# Altium PCB dimmerV2.PcbDoc
Units mil, origin at the board's own origin, x right, y up, seen from the top; angles counter-clockwise.
Board outline 2755.91 x 1732.28 mil, 2 copper layers (Top Layer, Bottom Layer); 25 components, 21 nets, 79 pads, 74 vias.
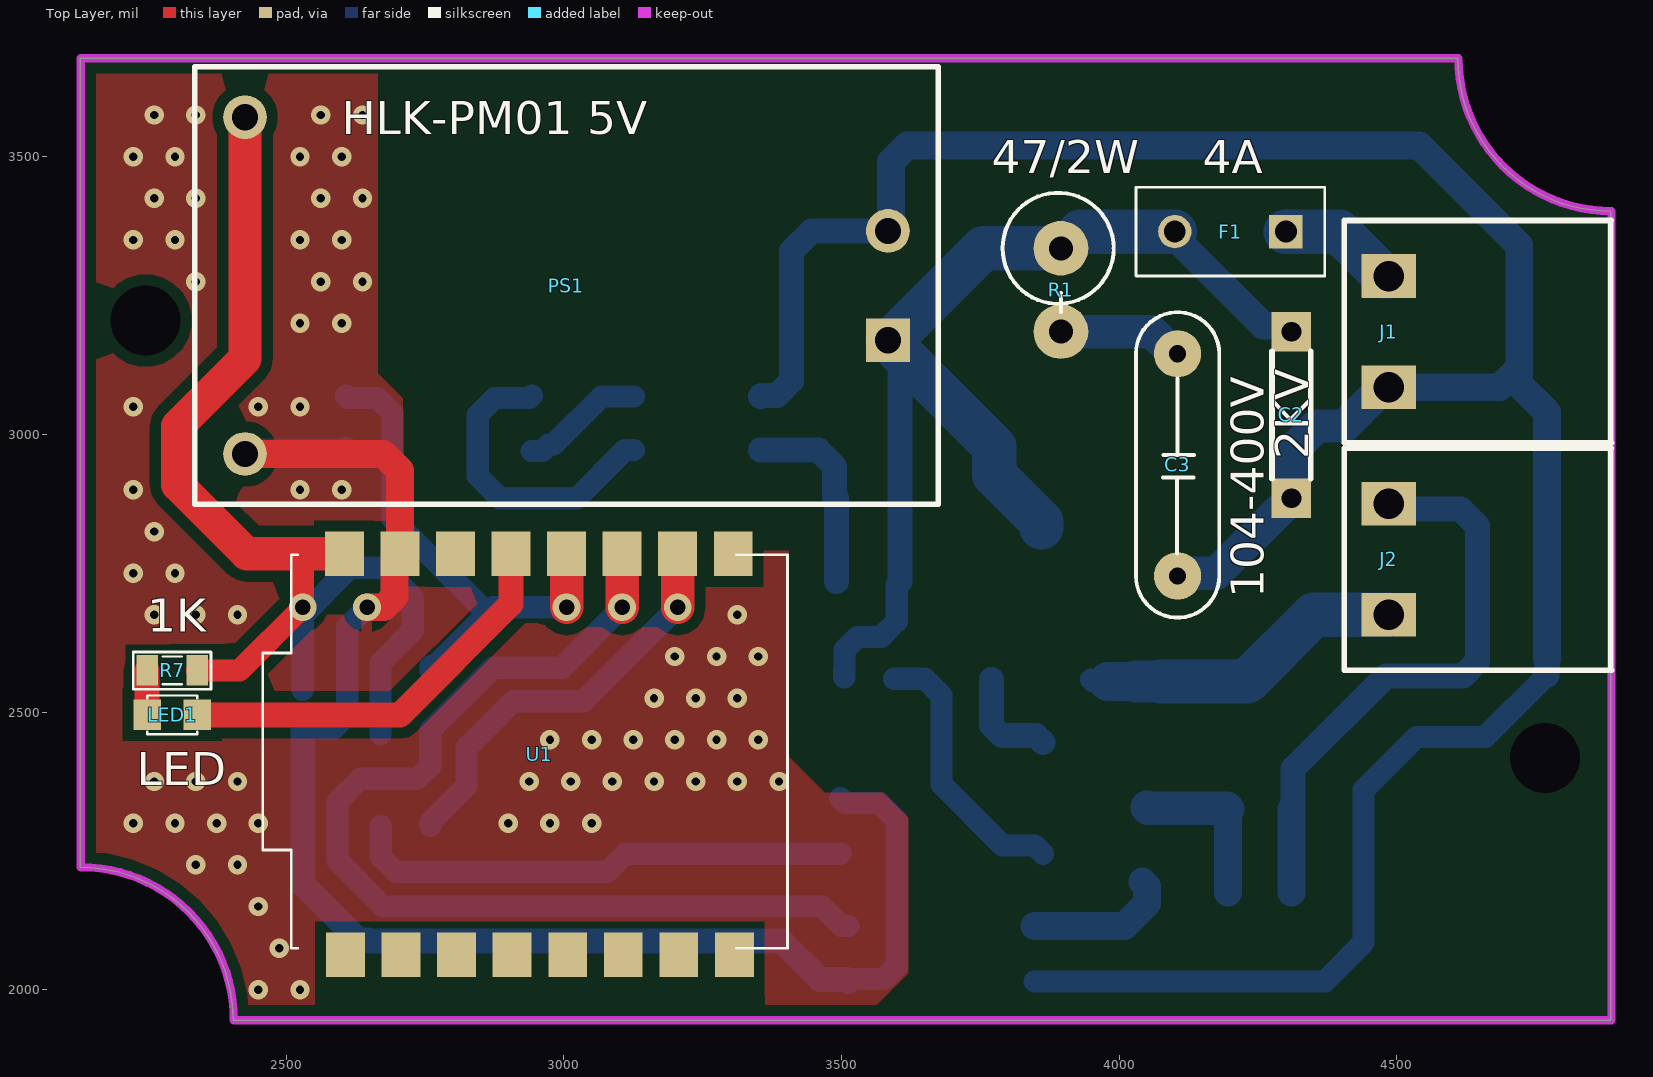
[diagram p0: Top Layer view]
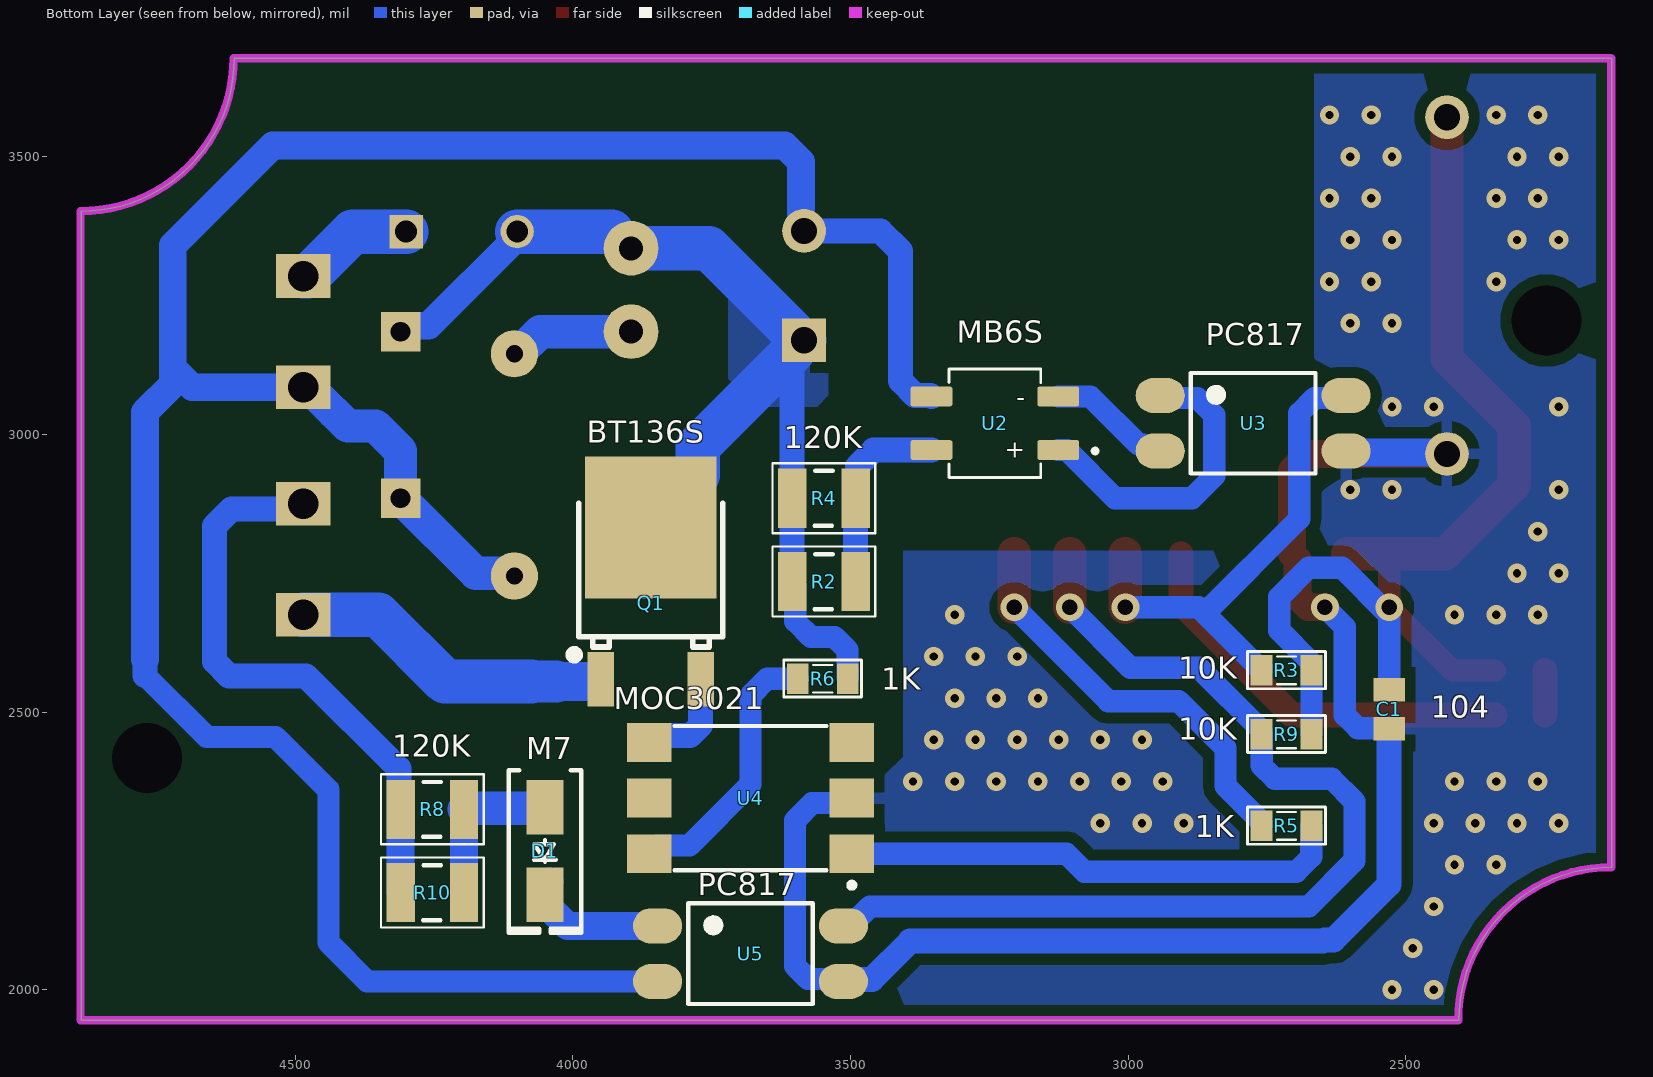
[diagram p1: Bottom Layer view, seen from below]

## Layer stack, top to bottom
Top Solder: solder mask 0.4, Solder Resist, Dk 3.5
Top Layer: signal copper 1.4
Dielectric 1: dielectric 12.6, FR-4, Dk 4.8
Bottom Layer: signal copper 1.4
Bottom Solder: solder mask 0.4, Solder Resist, Dk 3.5

## Board outline
2129.09,2220.59 cw(c2129.09,1945) 2404.69,1945 4885,1945 4885,3401.69 cw(c4885,3677.28) 4609.41,3677.28 2129.09,3677.28

## Design rules (kind name [scope] priority, off if disabled: settings)
Clearance Clearance_1 [InNetClass('AC') vs InNetClass('AC')] p1: gap=35 ignorepadtopadclearanceinfootprint=FALSE
Clearance [All] p2: gap=20 ignorepadtopadclearanceinfootprint=FALSE
PlaneConnect PlaneConnect_1 [InNetClass('AC')] p1: planeconnectstyle=Direct reliefexpansion=20 reliefentries=4 reliefconductorwidth=10 reliefairgap=10
PlaneConnect [All] p2: planeconnectstyle=Relief reliefexpansion=20 reliefentries=4 reliefconductorwidth=10 reliefairgap=10
PolygonConnect [All] p1: connectstyle=Relief reliefconductorwidth=19.68 reliefentries=4 polygonreliefangle="90 Angle" airgapwidth=19.68
RoutingVias [All] p1: holewidth=28 width=50 viastyle="Through Hole" minholewidth=28 minwidth=50 maxholewidth=28 maxwidth=50
SolderMaskExpansion [All] p1: expansion=4 istentingtop=FALSE
SupplyNets "Schematic Supply Nets_1" [InNet('GND')] p1: voltage=0.000
SupplyNets "Schematic Supply Nets" [InNet('+5')] p2: voltage=0.000
Width [All] p1: maxlimit=80 minlimit=30 preferedwidth=40
29 further rules are at their usual default settings.

## Classes and differential pairs
net class AC: AC_L AC_LOUT AC_N NetD1_1 NetD1_2 NetF1_1

## Components (designator, comment, footprint, x,y, rotation, side; value= is the part's Value field where it differs from the comment)
C1 "104" "cap 0805" 2530,2505 r270 bottom
C2 "2KV" "Cap 7.5mm" 4310,2885 r90 top
C3 "104-400V" "Cap 10mm" 4105,3145 r270 top
D1 "M7" "DIODE SMA" 4050,2250 r270 bottom
F1 "4A" "Fuse rectangular" 4300,3365 r180 top value=Fuse
J1 "AC IN" "CON 2 2EDG5.08 B" 4485,3285 r270 top
J2 "CON 2" "CON 2 2EDG5.08 B" 4485,2875 r270 top
LED1 "LED" LED-0805-Blue 2250,2495 r0 top value="LED 3 - 5 ly 2 Colour"
PS1 "HLK-PM01 5V" CONV_HLK-PM01-3W 3583.5,3267.87 r180 top
Q1 "BT136S" TO-252-3_L6.6-W6.1-P4.57-LS9.9-BR-CW 3865,2735 r270 bottom
R1 "47/2W" R2WD 3895,3135 r90 top value="R2W - 47"
R2 "120K" RES-SMD-1210 3550,2735 r180 bottom
R3 "10K" RES-SMD-0805 2715,2575 r0 bottom
R4 "120K" RES-SMD-1210 3550,2885 r180 bottom
R5 "1K" RES-SMD-0805 2715,2295 r0 bottom
R6 "1K" RES-SMD-0805 3550,2560 r0 bottom
R7 "1K" RES-SMD-0805 2295,2575 r0 top
R8 "120K" RES-SMD-1210 4255,2325 r180 bottom
R9 "10K" RES-SMD-0805 2715,2460 r0 bottom
R10 "120K" RES-SMD-1210 4255,2175 r180 bottom
U1 "ESP32-C3" ESP32-C3-SMD 2766,-226 r90 top
U2 "MB6S" TO269AA 3240,3020 r0 bottom
U3 "PC817" SOP4 2775,3020 r180 bottom
U4 "MOC3021" SO6 3680,2345 r90 bottom
U5 "PC817" SOP4 3680,2065 r180 bottom

## Footprints (in the part's own frame and the unit in brackets; to place one, negate y for a bottom-side part, rotate by r counter-clockwise, add the part's x,y. Pads: shape width x height; smd on the part's side, far side on the other; paste and mask are expansions set on the pad)
"Cap 7.5mm" [mm] "103 2KV"
  rect 1.8x1.8 hole 0.9: 1(0,0) 2(7.62,0)
  silkscreen extent 0.89,-0.89 6.73,0.89, body extent -0.19,-1.2 7.81,1.19, height 9.03
"Cap 10mm" [mil] "Cap np W 0.4"
  round 85 hole 31: 1(0,0) 2(400,0)
  silkscreen extent -75,-75 475,75, body extent -25,-64 431,64, height 236
"cap 0805" [mm]
  rect 1.08x1.42 smd: 1(-0.895,0) 2(0.895,0)
  body extent -1,-0.63 1,0.63, height 1.4
"CON 2 2EDG5.08 B" [mm]
  rect 2x2.5 hole 1.4: 1(0,0) 2(5.08,0)
  silkscreen extent -2.54,-2.03 7.62,10.21, body extent -2.5,-1.75 7.58,10.25, height 3.15
CONV_HLK-PM01-3W [mm]
  rect 2x2 hole 1.2: 1(0,2.5)
  round 2 hole 1.2: 2(0,-2.5) 3(29.4,7.7) 4(29.4,-7.7)
  silkscreen extent -2.3,-10 31.7,10, body extent -2.29,-10.1 31.71,10.1, height 15.3
"DIODE SMA" [mm] "SMA"
  rect 2.5x1.7 smd: 1(-2,0) 2(2,0)
  silkscreen extent -3.68,-1.65 3.75,1.65, body extent -2.6,-1.37 2.6,1.37, height 2.4
ESP32-C3-SMD [mil]
  rect 80x70 smd: 0(3011,-539) 1(3011,-439) 2(3011,-339) 3(3011,-239) 3.3(3011,-39) 4(3011,-139) 5(2289,159) 5V(3011,161) 6(2289,59) 7(2289,-41) 8(2289,-141) 9(2289,-241) 10(2289,-341) 20(2289,-441) 21(2289,-541) G(3011,61)
  silkscreen extent 2301,-637 3009,308, body extent 2296,-675 3004,270, height 164
"Fuse rectangular" [mil] "5.08 0.6"
  rect 60x60 hole 39.37: 1(0,0)
  round 60 hole 39.37: 2(200,0)
  silkscreen extent -70,-80 270,80, body extent -67,-79 267,79, height 315
LED-0805-Blue [mil]
  rect 50x55 smd: 1(0,0) 2(90,0)
  silkscreen extent 0,-35 90,35, body extent 5,-25 85,25, height 43
R2WD [mm] "R2W, 2 pin, 150mil"
  round 2.5 hole 1.1: 1(1.27,0) 2(5.08,0)
  silkscreen extent 2.16,-2.41 7.62,2.67, body extent -1.25,-2.41 7.6,2.59, height 13.97
RES-SMD-0805 [mil]
  rect 39.37x55 smd: 1(-45,0) 2(45,0)
  silkscreen extent -70,-34 70,33, body extent -39,-25 39,25, height 31
RES-SMD-1210 [mm] "Chip Capacitor, Body 3.2x2.5mm, IPC Medium Density"
  rect 1.3x2.7 smd: 1(-1.397,0) 2(1.503,0)
  silkscreen extent -2.3,-1.6 2.4,1.6, body extent -1.6,-1.25 1.6,1.25, height 0.6
SO6 [mil]
  rect 70x80 smd: 1(-100,-182.48) 2(0,-182.48) 3(100,-182.48) 5(0,182.48) 6(-100,182.48)
  rect 70x80 smd mask+0: 4(100,182.48)
  silkscreen extent -162,-187 130,137, body extent -138,-212 138,211, height 141
SOP4 [mm]
  oval 2.25x1.6 smd: 1(-4.25,1.27) 2(-4.25,-1.27) 3(4.25,-1.27) 4(4.25,1.27)
  silkscreen extent -2.85,-2.3 2.85,2.3, body extent -4.67,-2.29 4.93,2.31, height 3.6
TO269AA [mm]
  rrect23% 1.91x0.91 smd: 1(-2.9,1.225) 2(-2.9,-1.225) 3(2.9,-1.225) 4(2.9,1.225)
  silkscreen extent -4.68,-2.48 2.1,2.48, body extent -3.57,-2.44 3.47,2.51, height 2.7
TO-252-3_L6.6-W6.1-P4.57-LS9.9-BR-CW [mm]
  rect 2.5x1.2 smd: 1(4.475,-2.149) 3(4.475,2.423)
  rect 6.5x6 smd: 2(-2.475,0.137)
  silkscreen extent -3.57,-3.56 3.55,3.44, body extent -4.23,-3.29 5.47,3.29, height 2.32

## Part data
C1 C3: library part CN, "Capacitor"
C2: library part "Cap 103 2KV", "Capacitor Ceramic 2KV"
D1: library part "Diode M7 ( 4007 )", "Dán", Chung_Loai=Dán, Don_Vi=Con, Ma_Hang=MH000944, Ten_Linh_Kien="Diode M7 1N4007 SMD 1A 1000V"
F1: library part Fuse, "Fuse", Designed by=VanDungEvn
J1 J2: library part "CON 2 EDG", "CON2 KF terminal"
LED1: library part "LED SMD"
PS1: library part "CONV HLK-PM01", "220VAC to 5V"
Q1: library part BT136-800E_C2901010
R1: library part R2W, "Resistor 2W"
R2 R3 R4 R5 R6 R7 R8 R9 R10: library part Res-SMD, "Resistor", Manufacturer="Generic Components", Class=Passive, Published=08/06/2000, Publisher="Altium Hobart Technology Centre"
U2: "Bridge Rectifier"
U3 U5: library part "OPTO PC817 SMD", "Single Opto"
U4: "Single Opto"

## Free pads (board coordinates)
  round 60 hole 125.98: ""(2247.2,3204.84) ""(4766.89,2417.44)

## Via types
v1: diameter 35, hole 15, Top Layer to Bottom Layer, tented both sides, 69 vias
v2: diameter 50, hole 28, Top Layer to Bottom Layer, tented both sides, 5 vias

## Nets (pads, with @x,y where several pads share a name; then routed paths per layer and width w, separated by ;. In a path a pad name is that pad's centre, name@x,y a point inside that pad or via, vN(x,y) a via of type N, cw(c..) or ccw(c..) an arc to the next point about the centre after c; other vN are vias at no path point)
+5: C1.1 PS1.4 R3.1 R7.2 R9.1 U1.5V | length 2049.9
  Top Layer w40: R7.2 2416.34,2575 v2(2530,2688.66) 2530,2785
  Top Layer w60: PS1.4 2426.02,3136.02 2305,3015 2305,2909.36 2429.36,2785 2530,2785 U1.5V
  Bottom Layer w40: C1.1 2530,2675 2530.21,2675 2615.21,2760 2675,2760 2727.87,2707.13 2727.87,2646.63 2670.31,2589.07 R3.1@2670.31,2582.5 ; R9.1 R3.1
AC_L: C2.2 F1.2 PS1.1 Q1.2 R1.2 R2.1 R4.1 R6.1 | length 1943.5
  Bottom Layer w40: R6.1@3505,2562.5 3505,2574.35 3505.31,2574.66 3505.31,2611.57 3528.74,2635 3570.98,2635 3599.41,2663.43 3599.41,2729.41 R2.1
  Bottom Layer w45: PS1.1 3605,3147.95 R4.1 R2.1
  Bottom Layer w50: F1.2 4101.91,3363.09 4101.91,3353.09 4259.57,3195.43 4299.57,3195.43 C2.2
  Bottom Layer w80: PS1.1 3589.45,3169.45 3755,3335 R1.2 ; PS1.1@3605,3147.95 3775,2977.95 3775,2926.91 3859.63,2842.28 Q1.2 ; R1.2@3929.99,3365 F1.2
AC_LOUT: J2.2 Q1.1 | length 586.8
  Bottom Layer w40: Q1.1 3949.63,2558.62 3953.25,2555 3980,2555
  Bottom Layer w70: 3980,2555 4030,2555
  Bottom Layer w75: 4030,2555 4075,2555
  Bottom Layer w80: 4075,2555 4230,2555 4350,2675 J2.2
AC_N: C2.1 C3.2 J1.2 PS1.2 U2.3 U5.2 | length 4715.7
  Bottom Layer w40: U5.2 4370,2015 4440,2085 4440,2360 4535,2455 4658.8,2455 4770,2566.2
  Bottom Layer w45: U2.3 3355.94,3070 3383.64,3070 3410,3096.36 3410,3330 3446.3,3366.3 PS1.2 ; 4770,2566.2 4770,2595
  Bottom Layer w50: PS1.2 3589,3371.8 3589,3490.71 3618.29,3520 4540,3520 4720,3340 4720,3120 ; J1.2@4530,3085 4685,3085 4720,3120 ; 4770,2595 4770,3040 4720,3090 4720,3120
  Bottom Layer w60: C3.2 4109.78,2749.78 4174.78,2749.78 C2.1 4310,2970 4355,3015 4405,3015 4430,3040 4430.16,3040 4475.16,3085 J1.2
DIM: R5.2 U1.1 | length 748.3
  Top Layer w60: v2(3205,2688.66) U1.1
  Bottom Layer w40: R5.2 2760,2302.19 2825,2367.19 2825,2435 2909.62,2519.62 3035.97,2519.62 v2(3205,2688.66)
GND: C1.2 PS1.3 U1.G U3.3 U4.2 U5.3 | length 2877.8
  Top Layer w50: PS1.3 2675.28,2964.72 2705,2935 U1.G 2695,2775 2695,2707.94 2675.71,2688.66 v2(2645.71,2688.66)
  Bottom Layer w40: C1.2 2531.26,2471.02 2586.57,2471.02 2610,2494.46 2610,2652.94 v2(2645.71,2688.66) ; U4.2 3506.21,2336.31 3568.69,2336.31 3600,2305 3600,2042.83 3576.57,2019.4 3517.08,2019.4 U5.3
  Bottom Layer w45: C1.2 2530,2190 2630,2090 2646.61,2090 2649.11,2087.5 3392.5,2087.5 3461.56,2018.44 3509.23,2018.44 U5.3
  Bottom Layer w50: PS1.3 2428.81,2967.51 2605.19,2967.51 U3.3
  other v1: 2450,2000 2525,2000 2487.5,2075 2450,2150 2337.5,2225 2412.5,2225 2225,2300 2300,2300 2375,2300 2450,2300 2900,2300 2975,2300 3050,2300 2262.5,2375 2337.5,2375 2412.5,2375 2937.5,2375 3012.5,2375 3087.5,2375 3162.5,2375 3237.5,2375 3312.5,2375 3387.5,2375 2975,2450 3050,2450 3125,2450 3200,2450 3275,2450 3350,2450 3162.5,2525 3237.5,2525 3312.5,2525 3200,2600 3275,2600 3350,2600 2262.5,2675 2337.5,2675 2412.5,2675 3312.5,2675 2225,2750 2300,2750 2262.5,2825 2225,2900 2525,2900 2600,2900 2225,3050 2450,3050 2525,3050 2525,3200 2600,3200 2337.5,3275 2562.5,3275 2637.5,3275 2225,3350 2300,3350 2525,3350 2600,3350 2262.5,3425 2337.5,3425 2562.5,3425 2637.5,3425 2225,3500 2300,3500 2525,3500 2600,3500 2262.5,3575 2337.5,3575 2562.5,3575 2637.5,3575
NetC3_1: C3.1 R1.1 | length 226.6
  Bottom Layer w60: R1.1 4058.24,3185 4098.24,3145 C3.1
NetD1_1: D1.1 R8.2 R10.2 | length 297.4
  Bottom Layer w50: R10.2 R8.2
  Bottom Layer w60: D1.1 4051.87,2326.87 4193.96,2326.87 R8.2
NetD1_2: D1.2 U5.1 | length 262.5
  Bottom Layer w50: U5.1 4009.49,2115 4050,2155.51 D1.2 4050,2186.54 D1.2@4041.54,2195
NetF1_1: F1.1 J1.1 | length 218.1
  Bottom Layer w80: F1.1 4396.42,3365 4476.42,3285 J1.1
NetLED1_1: LED1.1 R7.1 | length 80
  Top Layer w45: LED1.1 R7.1
NetLED1_2: LED1.2 U1.4 | length 737.8
  Top Layer w45: LED1.2 2705,2495 2905,2695 U1.4
NetQ1_3: Q1.3 U4.4 | length 188.3
  Bottom Layer w45: Q1.3 3769.63,2476.36 3788.49,2457.5 3849.98,2457.5 U4.4
NetR2_2: R2.2 R4.2 U2.4 | length 354.3
  Bottom Layer w45: U2.4 3458.23,2971.77 3487.74,2942.26 3487.74,2888.09 R4.2 R2.2
NetR5_1: R5.1 U4.1 | length 907.5
  Bottom Layer w40: R5.1 2670.31,2294.69 2670.31,2239.54 2697.43,2212.43 3078.69,2212.43 3111.26,2245 U4.1
NetR6_2: R6.2 U4.6 | length 491.7
  Bottom Layer w40: R6.2 3650,2560 3680,2530 3680,2370 3790,2260 3847.48,2260 U4.6
NetU2_1: U2.1 U3.1 | length 555.2
  Bottom Layer w40: U3.1 2937.92,3065.6 2875.6,3065.6 2845,3035 2845,2925 2885,2885 3023.54,2885 3110.31,2971.77 U2.1
NetU2_2: U2.2 U3.2 | length 224.2
  Bottom Layer w40: U3.2 2961.34,2970 2972.84,2981.5 2981.5,2981.5 3068.23,3068.23 U2.2
SW: J2.1 R8.1 R10.1 | length 1056.5
  Bottom Layer w45: R8.1 4313.09,2328.09 4313.09,2398.09 4480,2565 4618.64,2565 4645,2591.36 4645,2835 4614.52,2865.48 4494.52,2865.48 J2.1
  Bottom Layer w50: R10.1 R8.1
SW_IN: R9.2 U1.2 U5.4 | length 1859
  Top Layer w60: v2(3105,2688.66) U1.2
  Bottom Layer w40: R9.2 2759.68,2459.69 2759.68,2403.43 2736.25,2380 2633.43,2380 2592.5,2339.07 2592.5,2232.5 2675,2150 3464.95,2150 3499.95,2115 U5.4 ; R9.2@2760,2467.19 2872.43,2579.62 2995.97,2579.62 v2(3105,2688.66)
ZC: R3.2 U1.3 U3.4 | length 921.3
  Top Layer w60: v2(3005,2688.66) U1.3
  Bottom Layer w40: U3.4 2612.08,3065.6 2664.4,3065.6 2691.97,3038.03 2691.97,2848.03 2862.5,2677.5 ; R3.2 2760,2582.19 2760.31,2582.5 2767.5,2582.5 2873.65,2688.66 v2(3005,2688.66)
pads on no net: U1.0 U1.3.3 U1.5 U1.6 U1.7 U1.8 U1.9 U1.10 U1.20 U1.21 U4.3 U4.5

## Polygon pours and split planes (outlines as drawn)
AC_L on Bottom Layer "AC_L_L02_P002" (solid, pour order 2): 3720,3320 3720,3100 3670,3050 3560,3050 3540,3070 3540,3210 3605,3210 3700,3305
GND on Bottom Layer "GND_L02_P001" (solid, pour order 1): 2125,2220 2195,2220 2215,2200 2250,2200 2290,2160 2295,2160 2385,2070 2385,2015 2405,1995 2405,1945 3535,1945 3620,2030 3620,2310 3575,2355 3470,2355 3405,2420 3405,2790 2800,2790 2710,2880 2710,3065 2665,3110 2665,3675 2125,3675
GND on Top Layer "GND_L01_P111" (solid, pour order 0): 2125,2220 2195,2220 2215,2200 2250,2200 2290,2160 2295,2160 2385,2070 2385,2015 2405,1995 2405,1945 3535,1945 3620,2030 3620,2310 3575,2355 3470,2355 3405,2420 3405,2790 2800,2790 2710,2880 2710,3065 2665,3110 2665,3675 2125,3675

## Keep-outs
Keep-Out Layer:
  lines w15: 2130.41,2220.75 cw(c2130.41,1945.16) 2406,1945.16 4886.32,1945.16 4886.32,3401.85 cw(c4886.32,3677.44) 4610.73,3677.44 2130.41,3677.44 2130.41,2220.75

## Silkscreen, mask and mechanical layers (free items; w line width, h text height)
Mechanical 1:
  circle w0.5: c2247.2,3204.84 r59.06
  circle w0.5: c4766.89,2417.44 r59.06

## Text inside footprints (layer, text, board x,y; h text height)
U2: Bottom Overlay "+" at 3184.93,2984.96 h32.04 r180; Bottom Overlay "-" at 3184.9,3075.1 h32.06 r180